# EAGLE board tree_lamp (EAGLE 5.11)
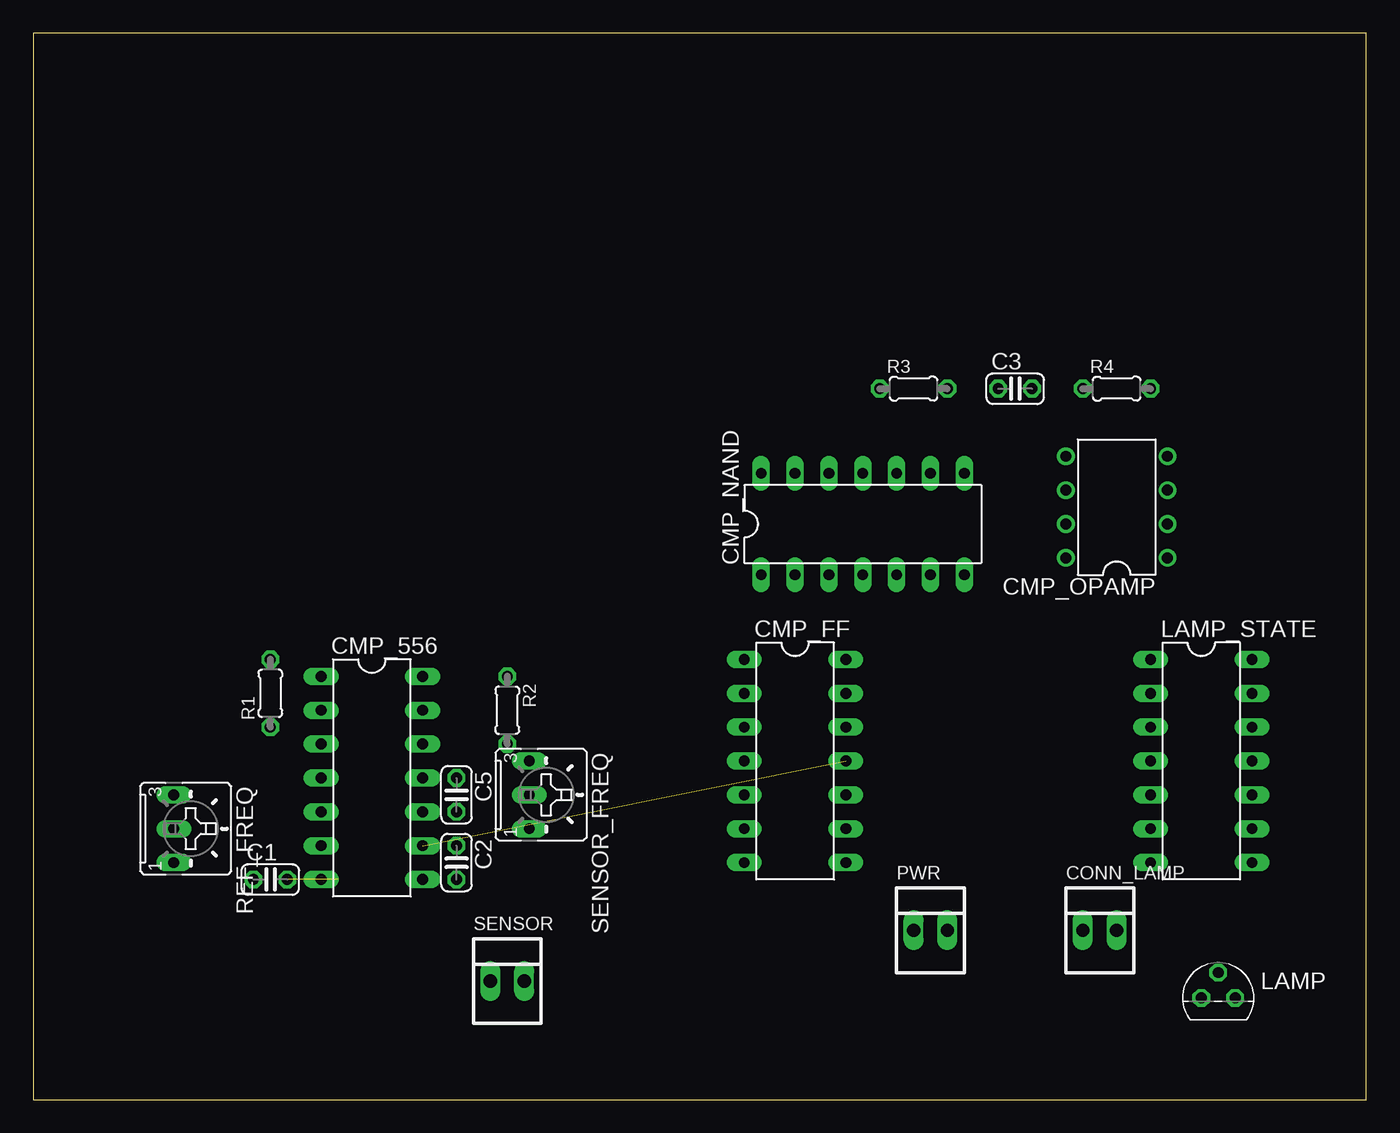
[diagram p0: board, top side]
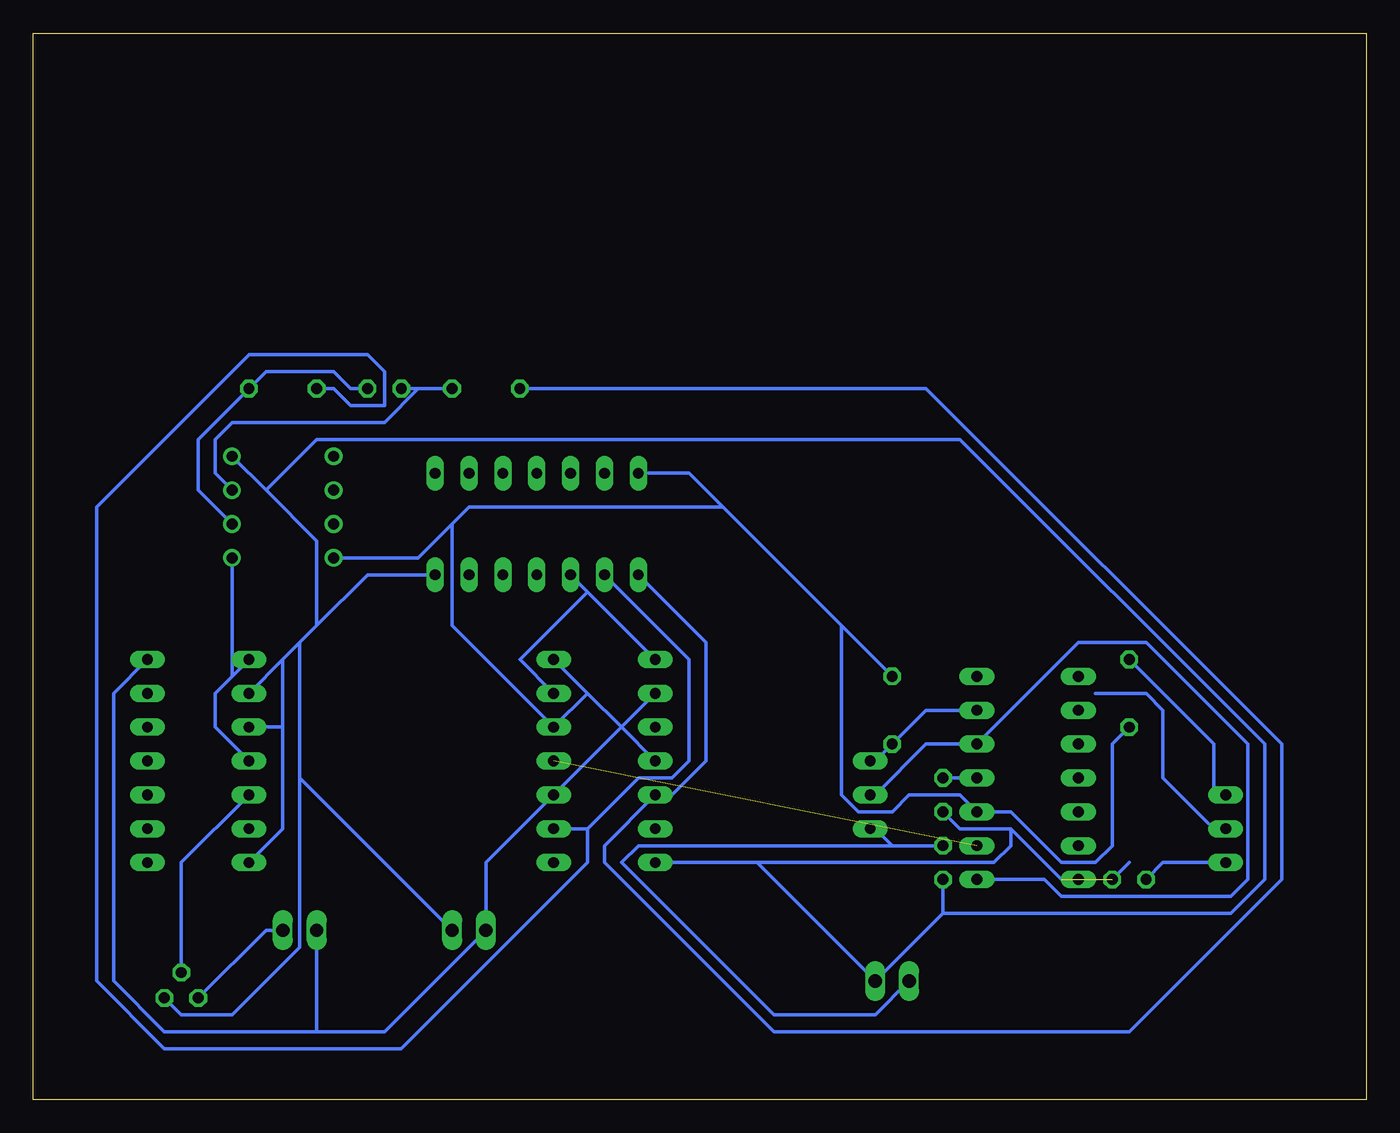
[diagram p1: board, bottom side, seen from below]

Size 100 x 80 mm. Coordinates in mm from the lower left corner, seen from the top.
Outline: 0,0 100,0 100,80 0,80 0,0
Copper layers (1*16): Top 0.035mm / dielectric 1.5mm / Bottom 0.035mm
Design rules "default": minimum track width 10mil, minimum drill 24mil, track to track 8mil, track to pad 8mil, pad to pad 8mil, via to via 8mil, smd to smd 8mil, copper to edge 40mil, drill to drill 8mil, minimum pad ring 10mil, minimum via ring 8mil, stop-mask expansion 4mil, vias tented up to drill 0mil, thermal gap 10mil

## Footprints (pad centres in the part's own frame; a part is rotated, then mirrored left to right if it is on the bottom)
C025-024X044 = drill 0.813 octagon: 1 -1.27,0; 2 1.27,0
DIL14 = drill 0.813 long: 1 -7.62,-3.81; 2 -5.08,-3.81; 3 -2.54,-3.81; 4 0,-3.81; 5 2.54,-3.81; 6 5.08,-3.81; 7 7.62,-3.81; 8 7.62,3.81; 9 5.08,3.81; 10 2.54,3.81; 11 0,3.81; 12 -2.54,3.81; 13 -5.08,3.81; 14 -7.62,3.81
DIL08 = drill 0.813 pad 1.27 round: 1 -3.81,-3.81; 2 -1.27,-3.81; 3 1.27,-3.81; 4 3.81,-3.81; 5 3.81,3.81; 6 1.27,3.81; 7 -1.27,3.81; 8 -3.81,3.81
22-23-2021 = drill 1 long: 1 -1.27,0; 2 1.27,0
TO92 = drill 0.813 octagon: 1 1.27,0; 2 0,1.905; 3 -1.27,0
0204/5 = drill 0.813 octagon: 1 -2.54,0; 2 2.54,0
B25U = drill 0.813 long: A 2.54,-0.889; E -2.54,-0.889; S 0,-0.889

## Placement (x,y rotation side)
C1  [C025-024X044]  17.78,16.51 0 top
C2  [C025-024X044]  31.75,17.78 270 top
C3  [C025-024X044]  73.66,53.34 0 top
C5  [C025-024X044]  31.75,22.86 270 top
CMP_556  LM556N  [DIL14]  25.4,24.13 270 top
CMP_FF  74LS74N  [DIL14]  57.15,25.4 270 top
CMP_NAND  74ALS00N  [DIL14]  62.23,43.18 0 top
CMP_OPAMP  LM358N  [DIL08]  81.28,44.45 90 top
CONN_LAMP  22-23-2021  [22-23-2021]  80.01,12.7 0 top
LAMP  [TO92]  88.9,7.62 0 top
LAMP_STATE  74LS74N  [DIL14]  87.63,25.4 270 top
PWR  22-23-2021  [22-23-2021]  67.31,12.7 0 top
R1  [0204/5]  17.78,30.48 90 top
R2  [0204/5]  35.56,29.21 270 top
R3  [0204/5]  66.04,53.34 0 top
R4  [0204/5]  81.28,53.34 0 top
REF_FREQ  [B25U]  11.43,20.32 270 top
SENSOR  22-23-2021  [22-23-2021]  35.56,8.89 0 top
SENSOR_FREQ  [B25U]  38.1,22.86 270 top

## Library data of the parts
C1-C3 C5 R1-R4 = rcl
CMP_556 CMP_OPAMP = linear
CMP_FF CMP_NAND LAMP_STATE = 74xx-us
CONN_LAMP PWR SENSOR = con-molex; MF: MOLEX; MPN: 22-23-2021; OC_FARNELL: 1462926; OC_NEWARK: 25C3832
LAMP = transistor
REF_FREQ SENSOR_FREQ = pot

## Nets
+5V: CMP_556.10 CMP_FF.2 CMP_FF.4 CMP_FF.10 CMP_FF.12 CMP_FF.14 CMP_NAND.14 CMP_OPAMP.8 CONN_LAMP.1 LAMP_STATE.14 PWR.1 R1.1 R2.1
GND: CMP_556.7
GNDA: C1.2 C2.2 C5.2 CMP_FF.7 CMP_NAND.7 CMP_OPAMP.4 LAMP.1 LAMP_STATE.2 LAMP_STATE.3 LAMP_STATE.7 PWR.2 SENSOR.2
N$1: CMP_FF.3
N$2: CMP_FF.5 CMP_NAND.1 R3.1
N$3: C3.1 CMP_OPAMP.3 R3.2
N$4: C3.2 CMP_OPAMP.2 R4.2
N$5: CMP_FF.9 CMP_NAND.2 R4.1
N$6: CMP_556.9 CMP_FF.11
N$7: CMP_FF.1 CMP_FF.13 CMP_NAND.3
N$8: CMP_556.13 R2.2 SENSOR_FREQ.E
N$9: CMP_556.8 CMP_556.12 SENSOR_FREQ.S
N$10: C2.1 SENSOR.1 SENSOR_FREQ.A
N$12: R1.2 REF_FREQ.E
N$13: C5.1 CMP_556.11
N$14: REF_FREQ.S
N$15: LAMP.2 LAMP_STATE.5
N$16: CMP_OPAMP.1 LAMP_STATE.1 LAMP_STATE.4
N$17: CONN_LAMP.2 LAMP.3
N$18: C1.1 REF_FREQ.A
V+: CMP_556.14

## Tracks (layer width: path | path; a pad name or v marks a point on that pad's centre or on a via)
+5V
  Bottom 0.254: 58.42,30.48 CMP_FF.14 | 58.42,30.48 55.88,27.94 | 55.88,27.94 CMP_FF.4 | 55.88,27.94 CMP_FF.2 | 55.88,27.94 CMP_FF.10 66.04,17.78 PWR.1 73.66,5.08 78.74,5.08 | 58.42,30.48 CMP_FF.12 68.58,35.56 68.58,43.18 | LAMP_STATE.14 93.98,30.48 93.98,8.89 90.17,5.08 78.74,5.08 | 78.74,5.08 CONN_LAMP.1 | R1.1 19.05,26.67 19.05,19.05 20.32,17.78 22.86,17.78 26.67,21.59 CMP_556.10 30.48,22.86 34.29,22.86 35.56,21.59 38.1,21.59 39.37,22.86 39.37,35.56 | CMP_NAND.14 50.8,46.99 48.26,44.45 | 39.37,35.56 R2.1 | 39.37,35.56 48.26,44.45 | CMP_OPAMP.8 71.12,40.64 68.58,43.18 | 68.58,43.18 67.31,44.45 48.26,44.45
GNDA  (1 unrouted)
  Bottom 0.254: C1.2 17.78,17.78 | C5.2 30.48,20.32 26.67,20.32 | 26.67,20.32 22.86,16.51 | 31.75,13.97 C2.2 | 31.75,13.97 SENSOR.2 45.72,17.78 | 45.72,17.78 CMP_FF.7 | 26.67,20.32 26.67,19.05 27.94,17.78 45.72,17.78 | CMP_NAND.7 74.93,39.37 78.74,35.56 | 81.28,33.02 LAMP_STATE.2 | 80.01,34.29 81.28,33.02 | 78.74,35.56 80.01,34.29 | LAMP_STATE.7 81.28,20.32 81.28,27.94 | 81.28,33.02 81.28,27.94 | LAMP.1 88.9,6.35 85.09,6.35 80.01,11.43 80.01,24.13 | 80.01,34.29 80.01,24.13 | 81.28,27.94 LAMP_STATE.3 | 82.55,45.72 78.74,41.91 78.74,35.56 | 82.55,45.72 CMP_OPAMP.4 | 80.01,24.13 PWR.2 | 31.75,13.97 10.16,13.97 7.62,16.51 7.62,26.67 30.48,49.53 78.74,49.53 82.55,45.72
N$2
  Bottom 0.254: CMP_NAND.1 49.53,34.29 49.53,25.4 52.07,22.86 CMP_FF.5 57.15,19.05 57.15,17.78 44.45,5.08 17.78,5.08 6.35,16.51 6.35,26.67 33.02,53.34 R3.1
N$3
  Bottom 0.254: 71.12,53.34 C3.1 | R3.2 71.12,53.34 | CMP_OPAMP.3 86.36,46.99 86.36,49.53 85.09,50.8 73.66,50.8 71.12,53.34
N$4
  Bottom 0.254: CMP_OPAMP.2 87.63,45.72 87.63,49.53 R4.2 82.55,54.61 77.47,54.61 76.2,53.34 C3.2
N$5
  Bottom 0.254: 58.42,20.32 CMP_FF.9 | 58.42,20.32 54.61,24.13 52.07,24.13 50.8,25.4 50.8,33.02 CMP_NAND.2 | R4.1 77.47,53.34 76.2,52.07 73.66,52.07 73.66,54.61 74.93,55.88 83.82,55.88 95.25,44.45 95.25,8.89 90.17,3.81 72.39,3.81 58.42,17.78 58.42,20.32
N$6  (1 unrouted)
N$7
  Bottom 0.254: 58.42,38.1 CMP_NAND.3 | CMP_FF.1 58.42,38.1 | CMP_FF.13 63.5,33.02 58.42,38.1
N$8
  Bottom 0.254: CMP_556.13 33.02,29.21 R2.2 36.83,25.4 SENSOR_FREQ.E
N$9
  Bottom 0.254: CMP_556.8 24.13,16.51 22.86,15.24 10.16,15.24 8.89,16.51 8.89,26.67 16.51,34.29 21.59,34.29 CMP_556.12 33.02,26.67 36.83,22.86 SENSOR_FREQ.S
N$10
  Bottom 0.254: 35.56,19.05 C2.1 | 35.56,19.05 36.83,20.32 SENSOR_FREQ.A | SENSOR.1 36.83,6.35 44.45,6.35 55.88,17.78 54.61,19.05 35.56,19.05
N$12
  Bottom 0.254: R1.2 16.51,31.75 11.43,26.67 11.43,22.86 REF_FREQ.E
N$13
  Bottom 0.254: CMP_556.11 C5.1
N$14
  Bottom 0.254: 20.32,30.48 16.51,30.48 15.24,29.21 15.24,24.13 11.43,20.32 REF_FREQ.S
N$15
  Bottom 0.254: LAMP_STATE.5 88.9,17.78 LAMP.2
N$16
  Bottom 0.254: LAMP_STATE.4 86.36,27.94 86.36,30.48 85.09,31.75 | 85.09,31.75 LAMP_STATE.1 | 85.09,31.75 CMP_OPAMP.1
N$17
  Bottom 0.254: LAMP.3 82.55,12.7 CONN_LAMP.2
N$18
  Bottom 0.254: C1.1 15.24,17.78 REF_FREQ.A